# Altium PCB Step Moter Control.PcbDoc
Units mil, origin at the board's own origin, x right, y up, seen from the top; angles counter-clockwise.
Board outline 1555.12 x 1653.54 mil, 2 copper layers (Top Layer, Bottom Layer), stack 34.296 mil thick; 38 components, 33 nets, 129 pads, 48 vias.
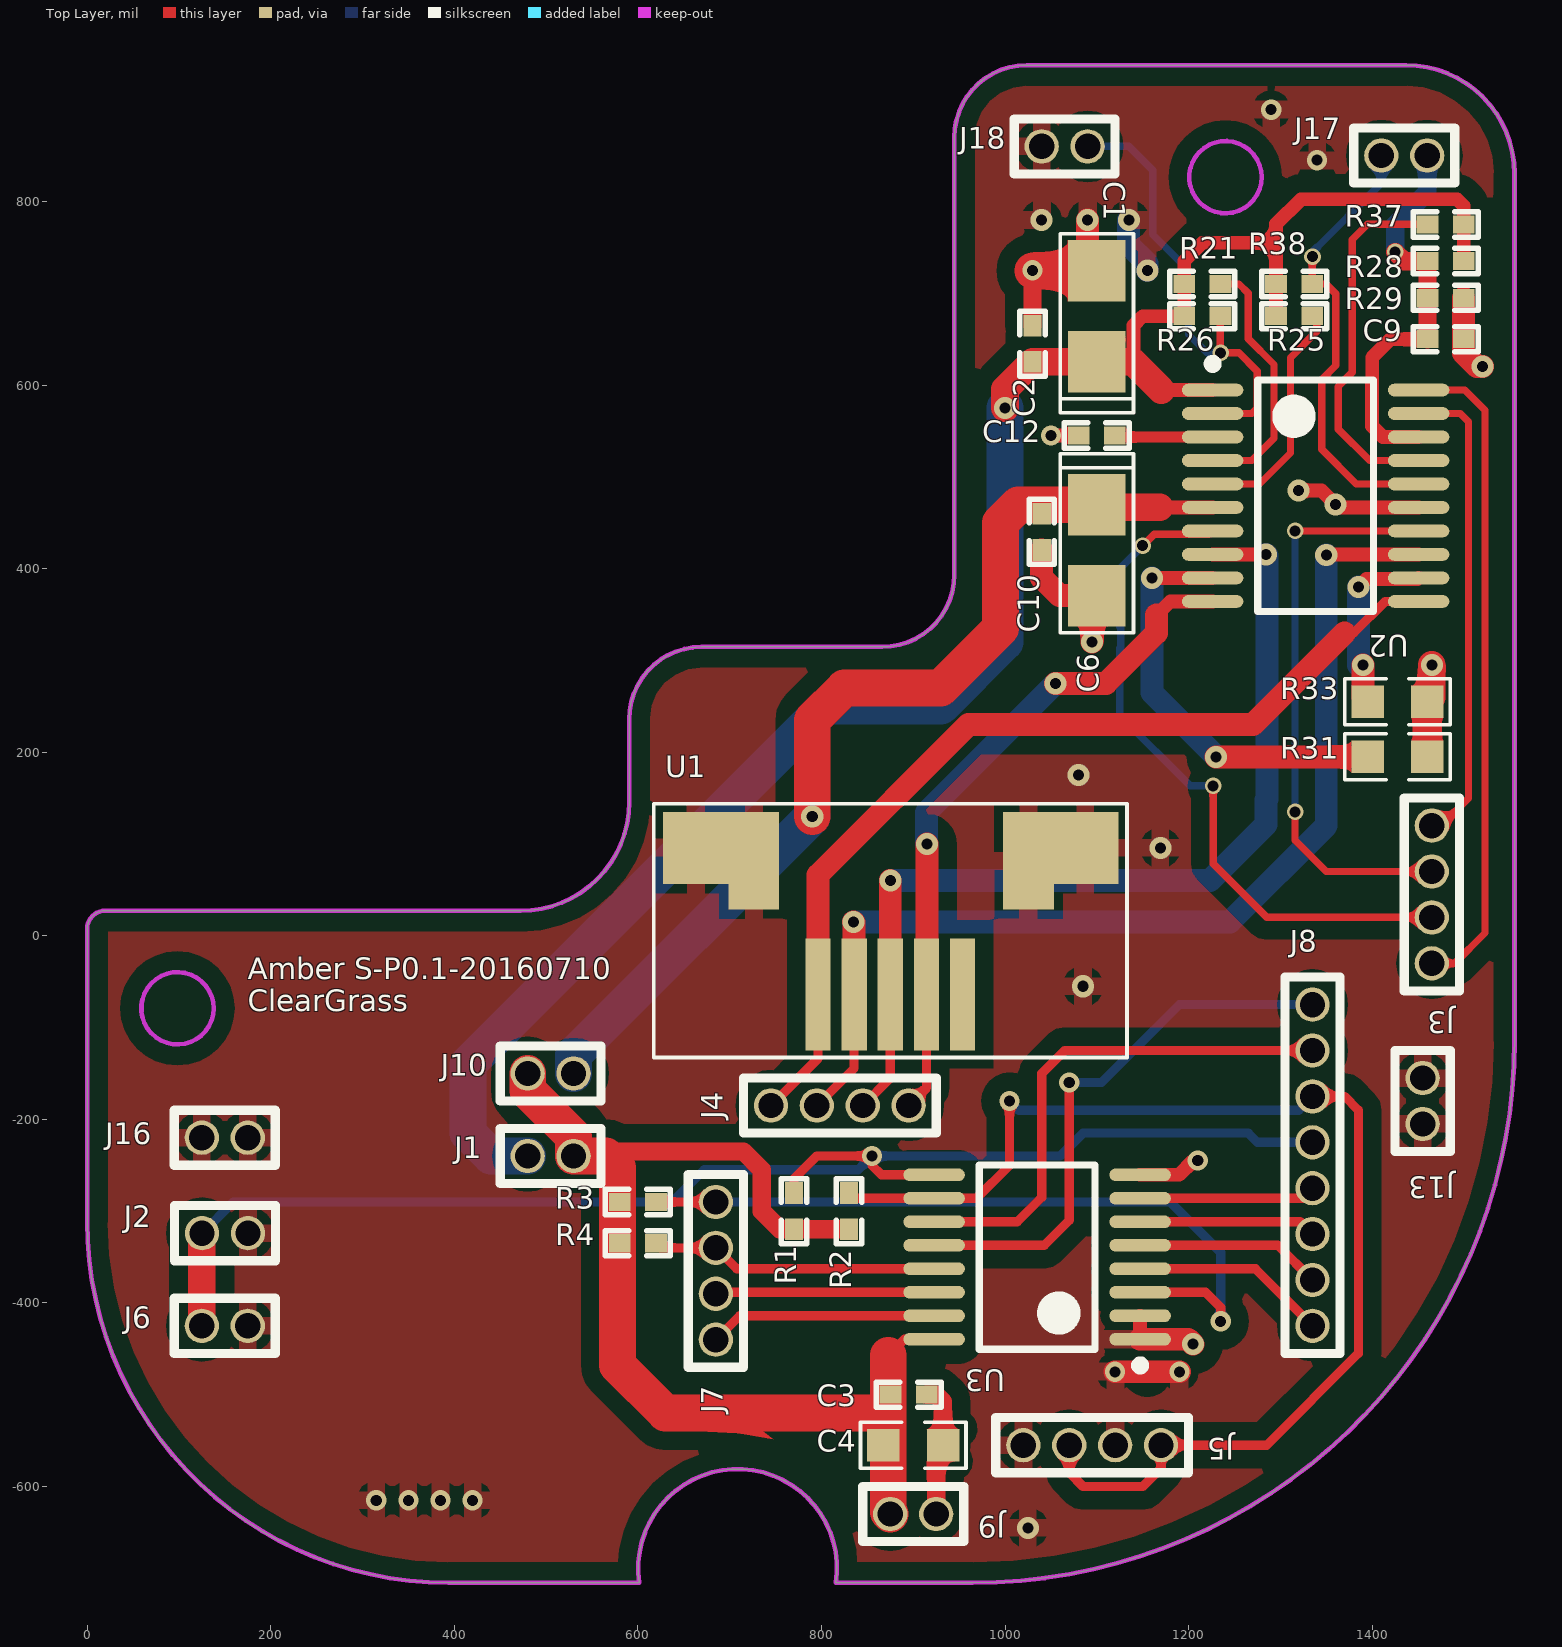
[diagram p0: Top Layer view]
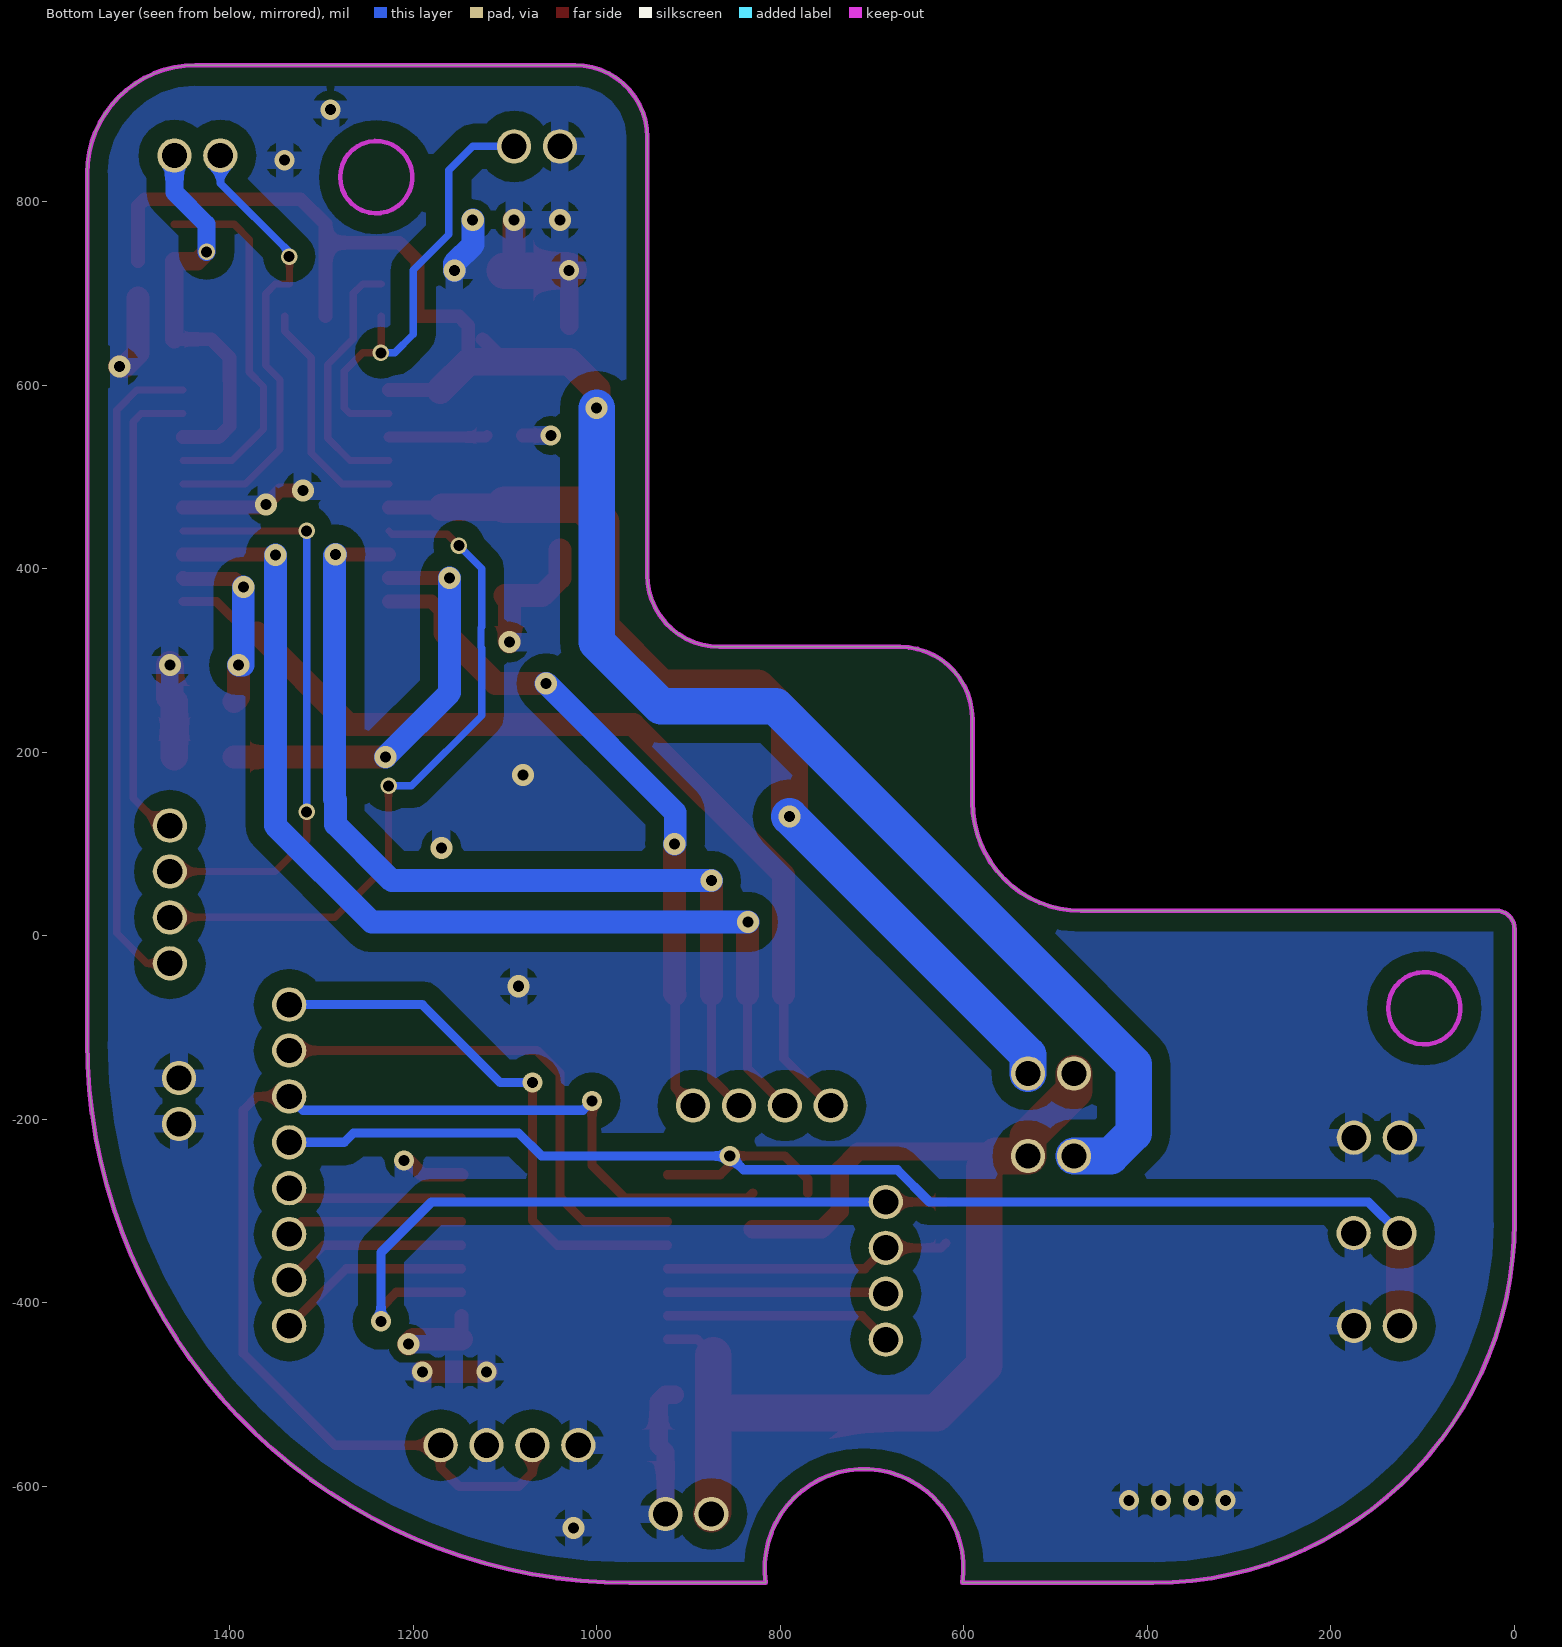
[diagram p1: Bottom Layer view, seen from below]

## Layer stack, top to bottom
Top Solder: solder mask 0.4, Solder Resist, Dk 3.5
Top Layer: signal copper 1.4
Dielectric1: core 31.496, FR-4, Dk 4.8
Bottom Layer: signal copper 1.4
Bottom Solder: solder mask 0.4, Solder Resist, Dk 3.5

## Board outline
0,-311.3 ccw(c393.7,-311.3) 393.7,-705 601.55,-705 cw(c708.66,-689.25) 815.78,-705 964.57,-705 ccw(c964.57,-114.45) 1555.12,-114.45 1555.12,830.43 ccw(c1437.01,830.43) 1437.01,948.54 1023.62,948.54 ccw(c1023.62,869.8) 944.88,869.8 944.88,393.43 cw(c866.14,393.43) 866.14,314.69 669.29,314.69 ccw(c669.29,235.95) 590.55,235.95 590.55,145.39 cw(c472.44,145.39) 472.44,27.28 19.68,27.28 ccw(c19.68,7.6) 0,7.6

## Design rules (kind name [scope] priority, off if disabled: settings)
Clearance [All] p1: gap=10
HoleToHoleClearance [All] p1: gap=0 allowstackedmicrovias=TRUE
MinimumSolderMaskSliver [All] p1: minsoldermaskwidth=0
PolygonConnect PolygonConnect_1 [All vs IsNamedPolygon('Bottom Layer-No Net')] p1: connectstyle=Relief reliefconductorwidth=10 reliefentries=4 polygonreliefangle="90 Angle" airgapwidth=10
PolygonConnect [All] p2: connectstyle=Relief reliefconductorwidth=19.68 reliefentries=4 polygonreliefangle="90 Angle" airgapwidth=10
RoutingVias [All] p1: holewidth=28 width=50 viastyle="Through Hole" minholewidth=28 minwidth=50 maxholewidth=28 maxwidth=50
SilkToSilkClearance [All] p1: silktosilkclearance=0
SilkToSolderMaskClearance SilkscreenOverComponentPads [IsPad] p1: minsilkscreentomaskgap=0 clearancetoexposedcopper=TRUE
SolderMaskExpansion [All] p1: expansion=4
Width [All] p1: maxlimit=50 minlimit=8 preferedwidth=10
26 further rules are at their usual default settings.

## Classes and differential pairs
component class "Remote 8-bit I2C": C3 C4 J7 J8 J9 R3 R4 U3
component class "Step Moter Control": C1 C2 C6 C9 C10 C12 J1 J2 J3 J4 J5 J6 J10 J13 J16 J17 J18 R1 R2 R21 R25 R26 R28 R29 R31 R33 R37 R38 U1 U2

## Components (designator, comment, footprint, x,y, rotation, side; value= is the part's Value field where it differs from the comment)
C1 "10uF/6.3V" 3216 1100,675 r90 top
C2 "0.1uF/10V/X7R/10%" 0402C 1030,645 r90 top
C3 "0.1uF/10V/X7R/10%" 0402C 895,-500 r0 top
C4 "10uF/10V/X7R/10%" 0603C 900,-555 r0 top
C6 "33uF/10V" 3216 1100,420 r270 top
C9 "0.1uF/10V/X7R/10%" 0402C 1480,650 r0 top
C10 "0.1uF/10V/X7R/10%" 0402C 1040,440 r270 top
C12 "220pF/10V 5%" 0402C 1100,545 r180 top
J1 "Jump" "Debug- 1.27*2" 505,-240 r0 top
J2 "TEST" "Debug- 1.27*2" 150.24,-323.98 r0 top locked
J3 "JAMP" "Debug- 1.27*4" 1465,45 r90 top
J4 "JAMP" "Debug- 1.27*4" 820,-185 r0 top
J5 "JAMP" "Debug- 1.27*4" 1095,-555 r180 top
J6 "JAMP" "Debug- 1.27*2" 150,-425 r0 top
J7 "JAMP" "Debug- 1.27*4" 685,-365 r90 top
J8 "JAMP" "Debug- 1.27*8" 1335,-250 r90 top
J9 "JAMP" "Debug- 1.27*2" 900,-630 r0 top
J10 "Jump" "Debug- 1.27*2" 505,-150 r180 top
J13 "Jump" "Debug- 1.27*2" 1455,-180 r90 top
J16 "Jump" "Debug- 1.27*2" 150,-220 r180 top
J17 "JAMP" "Debug- 1.27*2" 1435,850 r0 top
J18 "JAMP" "Debug- 1.27*2" 1065,860 r180 top
R1 "4.7K/1%" 0402R 770,-300 r270 top
R2 "4.7K/1%" 0402R 830,-300 r270 top
R3 "10K/1%" 0402R 600,-290 r180 top
R4 "10K/1%" 0402R 600,-335 r180 top
R21 "1K/1%" 0402R 1215,710 r180 top
R25 "1K/1%" 0402R 1315,675 r180 top
R26 "1K/1%" 0402R 1215,675 r180 top
R28 "2.2M/1%" 0402R 1480,735 r0 top
R29 "1M/1%" 0402R 1480,695 r180 top
R31 "0.33R/1%" 0603R 1460,195 r180 top
R33 "0.33R/1%" 0603R 1460,255 r180 top
R37 "1K/1%" 0402R 1480,775 r0 top
R38 "1K/1%" 0402R 1315,710 r180 top
U1 "VSM1069" 6200 875,15 r180 top
U2 "TC78S600FNG" TSSOP-20 1338.47,505 r0 top
U3 "PCA9538" TSSOP-16 1035,-350 r180 top

## Footprints (in the part's own frame and the unit in brackets; to place one, negate y for a bottom-side part, rotate by r counter-clockwise, add the part's x,y. Pads: shape width x height; smd on the part's side, far side on the other; paste and mask are expansions set on the pad)
0402C [mm]
  rect 0.6x0.5 smd: 1(-0.5,0) 2(0.5,0)
  silkscreen extent -0.9,-0.35 0.9,0.35, body extent -0.51,-0.25 0.51,0.25, height 0.5
0402R [mm]
  rect 0.6x0.5 smd: 1(-0.5,0) 2(0.5,0)
  silkscreen extent -0.9,-0.35 0.9,0.35, body extent -0.51,-0.25 0.51,0.25, height 0.5
0603C [mm]
  rect 0.9x0.9 smd: 1(-0.826,0) 2(0.826,0)
  silkscreen extent -1.46,-0.64 1.46,0.64, body extent -1.38,-0.55 1.38,0.55, height 0.9
0603R [mm]
  rect 0.9x0.9 smd: 1(0,0) 2(1.651,0)
  silkscreen extent -0.64,-0.64 2.29,0.64, body extent -0.55,-0.55 2.2,0.55, height 0.5
3216 [mm]
  rect 1.7x1.6 smd: 1(-1.256,0) 2(1.256,0)
  silkscreen extent -2.67,-1.02 2.29,1.02, body extent -1.72,-0.85 1.72,0.85, height 1.8
6200 [mm]
  rect 0.7x3.1 smd: 1(2,2) 2(1,2) 3(0,2) 4(-1,2) 5(-2,2)
  rect 1.83x2 smd: ""(-5.4,-2.05) ""(5.375,-2.05)
  rect 1.4x2.7 smd: ""(-3.825,-1.7) ""(3.775,-1.7)
  silkscreen extent -6.55,-3.27 6.55,3.75
"Debug- 1.27*2" [mm]
  round 0.95 hole 0.7: 1(-0.635,0) 2(0.635,0)
  silkscreen extent -1.4,-0.76 1.4,0.76, body extent -1.21,-0.58 1.21,0.58
"Debug- 1.27*4" [mm]
  round 0.95 hole 0.7: 1(-1.905,0) 2(-0.635,0) 3(0.635,0) 4(1.905,0)
  silkscreen extent -2.67,-0.76 2.67,0.76
"Debug- 1.27*8" [mm]
  round 0.95 hole 0.7: 1(-4.445,0) 2(-3.175,0) 3(-1.905,0) 4(-0.635,0) 5(0.635,0) 6(1.905,0) 7(3.175,0) 8(4.445,0)
  silkscreen extent -5.21,-0.76 5.21,0.76
TSSOP-16 [mm] "TSOP, 16-Leads, Body 5.1x4.5mm (max), Pitch 0"
  oval 1.7x0.35 smd: 1(-2.85,2.275) 2(-2.85,1.625) 3(-2.85,0.975) 4(-2.85,0.325) 5(-2.85,-0.325) 6(-2.85,-0.975) 7(-2.85,-1.625) 8(-2.85,-2.275) 9(2.85,-2.275) 10(2.85,-1.625) 11(2.85,-0.975) 12(2.85,-0.325) 13(2.85,0.325) 14(2.85,0.975) 15(2.85,1.625) 16(2.85,2.275)
  silkscreen extent -2.98,-2.55 1.6,3.12, body extent -2.25,-2.55 2.25,2.55, height 1.2
TSSOP-20 [mm] "TSOP, 16-Leads, Body 5.1x4.5mm (max), Pitch 0.65mm, IPC Medium Density"
  oval 1.7x0.35 smd: 1(-2.85,2.275) 2(-2.85,1.625) 3(-2.85,0.975) 4(-2.85,0.325) 5(-2.85,-0.325) 6(-2.85,-0.975) 7(-2.85,-1.625) 8(-2.85,-2.275) 9(-2.85,-2.925) 10(-2.85,-3.575) 11(2.85,-3.575) 12(2.85,-2.925) 13(2.85,-2.275) 14(2.85,-1.625) 15(2.85,-0.975) 16(2.85,-0.325) 17(2.85,0.325) 18(2.85,0.975) 19(2.85,1.625) 20(2.85,2.275)
  silkscreen extent -2.97,-3.85 1.6,3.12, body extent -2.25,-3.9 2.25,2.55, height 1.2

## Part data
C1 C6: library part Cap, "厂家：ROHM，型号："
C2 C3 C9 C10 C12: library part CAP, "厂家：Murata，型号：GRM155R71A104KA01D"
C4: library part CAP, "厂家：Murata，型号：GRM188R61A106KE69D"
J1 J10 J13 J16: library part JAMP, "厂家：暂定，型号：暂定"
J2 J3 J4 J5 J6 J7 J8 J9 J17 J18: "厂家：暂定，型号：暂定"
R1 R2 R21 R25 R26 R28 R29 R31 R33 R37 R38: library part RES1, "厂家：Yageo，型号：RC0402FR-074K7L"
R3 R4: library part RES1, "厂家：Yageo，型号：RC0402FR-0710KL"
U1: "厂家：常州唯可泰，型号：VSM1069；二相步进电机"
U3: "厂家：TI，型号：PCA9538 Remote 8-bit I2C with interrupt output"

## Via types
v1: diameter 24, hole 12, Top Layer to Bottom Layer, tented both sides, 26 vias
v2: diameter 22, hole 12, Top Layer to Bottom Layer, tented both sides, 15 vias
v3: diameter 18, hole 12, Top Layer to Bottom Layer, tented both sides, 7 vias

## Nets (pads, with @x,y where several pads share a name; then routed paths per layer and width w, separated by ;. In a path a pad name is that pad's centre, name@x,y a point inside that pad or via, vN(x,y) a via of type N, cw(c..) or ccw(c..) an arc to the next point about the centre after c; other vN are vias at no path point)
2.8V: C3.1 C4.1 J1.2 J9.1 J10.2 R1.2 R2.2 R3.2 R4.2 U3.16 | length 1255
  Top Layer w10: 872.87,-457.13 890.43,-439.57 U3.16
  Top Layer w20: 565,-240 570,-235 715,-235 735,-255 735,-300 754.69,-319.69 R1.2 R2.2
  Top Layer w40: J10.2 480,-168.87 530,-218.87 J1.2 565,-240 577.87,-252.87 577.87,-467.87 630,-520 872.87,-520 ; 872.87,-457.13 872.87,-520 ; J9.1 872.87,-627.87 872.87,-520
AW_CONTROL: J8.2 U3.5 | length 203.5
  Top Layer w10: U3.5 1297.2,-337.2 J8.2
BUZZER_POWER: J8.4 U3.7 | length 192.4
  Top Layer w10: U3.7 1323.98,-286.02 J8.4
CK: J3.1 U2.20 | length 722.6
  Top Layer w8: U2.20 1500.89,594.57 1523,572.46 1523,3 1490,-30 J3.1
CW_CCW: J3.2 U2.7 | length 760
  Top Layer w8: v3(1150,425) 1162.61,437.61 1222.85,437.61 U2.7 ; v3(1226.72,163.28) 1226.72,78.28 1285,20 J3.2
  Bottom Layer w8: v3(1150,425) 1125,400 1125,336.77 1126,335.77 1126,314.23 1125,313.23 1125,240 1201.72,163.28 v3(1226.72,163.28)
DC/DC_CTRL: J8.3 U3.6 | length 193.3
  Top Layer w10: U3.6 1321.61,-311.61 J8.3
DC/DC_PG: J8.7 U3.11 | length 568.6
  Top Layer w10: U3.11 1013.39,-311.61 1040,-285 1040,-150 1065,-125 J8.7
ENABLE: J3.4 U2.19 | length 520.5
  Top Layer w8: U2.19 1496.02,568.98 1505,560 1505,150 1475,120 J3.4
EXTEND_I\N\T\: J7.3 R4.1 U3.13 | length 314.6
  Top Layer w10: R4.1 624.68,-340 J7.3 707.8,-362.8 U3.13
EXTEND_R\E\S\E\T\: J7.4 R3.1 U3.3 | length 822.8
  Top Layer w10: R3.1 J7.4 ; U3.3 1218.39,-388.39 1235,-405 v2(1235,-420)
  Bottom Layer w10: J7.4 1180,-290 1235,-345 v2(1235,-420)
GND: C1.2 C2.2 C3.2 C4.2 C6.2 C9.2 C10.2 C12.2 J2.2 J5.2 J5.4 J6.2 J9.2 J13.1 J13.2 J16.1 J16.2 J18.2 R29.1 R31.1 R33.1 U1. U2.15 U3.1 U3.2 U3.8 | length 1133.5
  Top Layer w15: v2(1050,545) C12.2 ; U3.1 U3.2 ; U3.8 1189.57,-260.43 1205,-245 v2(1210,-245) ; v1(1320,485) 1345,485 v1(1360,470) 1363.39,466.61 U2.15
  Top Layer w20: C3.2 925,-500 932.5,-507.5 C4.2 925,-562.5 J9.2 ; C2.2 v2(1030,725)
  Top Layer w25: v2(1030,725) v2@1030.55,724.45 ; C10.2 1040,390 1059.45,370.55 C6.2 1095,365.55 v1(1095,320) ; v1(1090,780) 1090,734.45 C1.2 ; v2(1120,-475) v2(1190,-475) ; U3.1 1199.57,-439.57 v1(1205,-445) ; R29.1 C9.2 1499.69,634.69 1514.37,620 v1(1520,620)
  Top Layer w30: R31.1 R33.1 1465,260 v1(1465,295)
  Top Layer w40: v2@1030.55,724.45 C1.2
  Bottom Layer w25: v1@1134.5,780 1134.5,753.02 1155,732.52 v1(1155,725)
  other v1: 1025,-645 1085,-55 1169.29,95.71 1080,175 1040,780 1135,780
  other v2: 315,-615 350,-615 385,-615 420,-615 1340,845 1290,900
HALL_OUT: J8.1 U3.4 | length 213.6
  Top Layer w10: U3.4 1272.8,-362.8 J8.1
I2C_A_SCL_T_E: J7.2 U3.14 | length 238.5
  Top Layer w10: J7.2 686.61,-388.39 U3.14
I2C_A_SDA_T_E: J7.1 U3.15 | length 248.6
  Top Layer w10: J7.1 711.02,-413.98 U3.15
INIT_TEST: J2.1 J6.1 J8.5 R1.1 U3.9 | length 1543
  Top Layer w10: R1.1 770,-265 795,-240 v2(855,-240) ; v2@855,-250 865.43,-260.43 U3.9
  Top Layer w30: J6.1 125,-324.21 J2.1
  Bottom Layer w10: J2.1 159.21,-290 637.34,-290 672.34,-255 840,-255 v2(855,-240) 1060,-240 1085,-215 1265,-215 1275,-225 J8.5
M1: R21.1 U2.4 | length 280.8
  Top Layer w8: U2.4 1268.8,517.8 1293,542 1293,622.46 1265,650.46 1265,700 1255,710 R21.1
M2: R25.1 U2.5 | length 259.6
  Top Layer w8: U2.5 1277.2,492.2 1311,526 1311,629.91 1339.68,658.6 R25.1@1339.68,675
M_VCC: C1.1 C2.1 J1.1 R21.2 R25.2 R26.2 R28.2 R37.2 R38.2 U2.1 | length 2134.1
  Top Layer w15: C1.1 C1.1@1124.45,650 ; 1139.45,625.55 1140,626.1 1140,665 1150,675 R26.2 R21.2 1195.31,735.31 1215,755 1295.31,755 ; 1170.43,594.57 U2.1 ; R25.2 R38.2 1295.31,755 ; R28.2 R37.2 1499.69,795.31 1492.66,802.34 1322.34,802.34 1295.31,775.31 1295.31,755
  Top Layer w30: v1(1000,575) 1000,595.32 C2.1 1030.24,625.55 C1.1 1139.45,625.55 1170.43,594.57
  Bottom Layer w40: J1.1 440,-240 415,-215 415,-140 805,250 930,250 1000,320 v1(1000,575)
MO_N: J17.1 R38.1 U2.16 | length 498.2
  Top Layer w8: v3@1334.68,739.68 R38.1 1350,710 1360.5,699.5 1360.5,621.32 1345,605.82 1345,530 1382.8,492.2 U2.16
  Bottom Layer w8: v3(1335,740) 1335,745 1410,820 J17.1
MOTOR_AO1: J4.2 U1.2 U2.13 | length 1171.4
  Top Layer w10: J4.2 835.63,-144.37 U1.2
  Top Layer w15: v1(1350,415) 1350.43,415.43 U2.13
  Top Layer w25: v1(835,15) 835.63,14.37 U1.2
  Bottom Layer w25: v1(835,15) 1245,15 1350,120 v1(1350,415)
MOTOR_AO2: J4.1 U1.1 U2.11 | length 1050.3
  Top Layer w10: J4.1 796.26,-133.74 U1.1 ; 1370,330 1380,330 1414.25,364.25 U2.11
  Top Layer w25: U1.1 796.26,66.26 960,230 1270,230 1370,330
MOTOR_BO1: J4.4 U1.4 U2.10 | length 746.3
  Top Layer w10: J4.4 914.37,-165.63 U1.4
  Top Layer w15: 1165,349.25 1180,364.25 U2.10
  Top Layer w25: U1.4 915,-63.11 v1(915,100) ; v1(1055,275) 1110,275 1165,330 1165,349.25
  Bottom Layer w25: v1(915,100) 914.37,100.63 914.37,134.37 v1(1055,275)
MOTOR_BO2: J4.3 U1.3 U2.8 | length 1045.5
  Top Layer w10: J4.3 875,-155 U1.3
  Top Layer w15: U2.8 v1(1284.57,415.43)
  Top Layer w25: U1.3 v1(875,60)
  Bottom Layer w25: v1(875,60) 1223.16,60 1284.52,121.37 1284.52,148.05 1285.52,149.05 1285.52,414.48 v1(1284.57,415.43)
OSC: C12.1 U2.3 | length 107.2
  Top Layer w12: C12.1 1121.3,543.39 U2.3
P7: J8.8 U3.12 | length 608.7
  Top Layer w10: U3.12 1042.8,-337.2 1070,-310 v2(1070,-160)
  Bottom Layer w10: v2(1070,-160) 1105,-160 1190,-75 J8.8
RESET: J3.3 U2.14 | length 634.7
  Top Layer w8: v3(1316.02,135) 1316.02,103.98 1350,70 J3.3 ; v3(1316.02,441.02) U2.14
  Bottom Layer w8: v3(1316.02,135) v3(1316.02,441.02)
RFA: R33.2 U2.12 | length 201.8
  Top Layer w15: v1(1385,380) 1393.64,388.64 1449.47,388.64 U2.12
  Top Layer w25: v1(1390,295) 1390,260 R33.2
  Bottom Layer w25: v1(1385,380) 1385,295 v1(1390,295)
RFB: R31.2 U2.9 | length 454.9
  Top Layer w15: v1(1160.16,389.84) U2.9
  Top Layer w25: v1(1230,195) R31.2
  Bottom Layer w25: v1(1160.16,389.84) 1160.16,264.84 v1(1230,195)
STBY: J18.1 R26.1 U2.2 | length 499.9
  Top Layer w8: U2.2 1268.98,568.98 1275,575 1275,615 1255,635 v3(1235,635) 1234.68,635.32 R26.1
  Bottom Layer w8: J18.1 1135,860 1161,834 1161,764 1200,725 1200,655 1220,635 v3(1235,635)
SW_TEST: J5.1 J5.3 J8.6 R2.1 U3.10 | length 1349.8
  Top Layer w10: R2.1 835.71,-286.02 U3.10 968.98,-286.02 1005,-250 v2(1005,-180) ; J5.3 1070,-585 1085,-600 1150,-600 1170,-580 J5.1 1285,-555 1385,-455 1385,-190 1370,-175 J8.6
  Bottom Layer w10: v2(1005,-180) 1015,-190 1320,-190 J8.6
TQ: R37.1 U2.17 | length 403.4
  Top Layer w8: U2.17 1397.2,517.8 1363,552 1363,598.37 1378.5,613.86 1378.5,758.5 1395,775 R37.1
VM: C6.1 C10.1 J10.1 U2.6 | length 1094.6
  Top Layer w15: 1168.39,466.61 U2.6
  Top Layer w30: C6.1 1102.83,466.61 1168.39,466.61
  Top Layer w40: v1(790,130) 790,235 825,270 930,270 995,335 995,450 1014.45,469.45 C6.1
  Bottom Layer w40: J10.1 530,-130 v1(790,130)
VREF: C9.1 J17.2 R28.1 R29.2 U2.18 | length 443.3
  Top Layer w15: U2.18 1411.61,543.39 1399.71,555.29 1399.71,604.67 1400,604.96 1400,630 1420,650 C9.1
  Top Layer w20: v3(1425,745) 1435,735 R28.1 ; C9.1 R28.1
  Bottom Layer w20: v3(1425,745) 1425,775 1460,810 J17.2
pads on no net: U1.5

## Polygon pours and split planes (outlines as drawn)
GND on Top Layer "Top Layer-No Net" (solid, remove dead copper, pour order 39): 0,-311.3 ccw(c393.7,-311.3) 393.7,-705 601.55,-705 cw(c708.66,-689.25) 815.78,-705 964.57,-705 ccw(c964.57,-114.45) 1555.12,-114.45 1555.12,830.43 ccw(c1437.01,830.43) 1437.01,948.54 1023.62,948.54 ccw(c1023.62,869.8) 944.88,869.8 944.88,393.43 cw(c866.14,393.43) 866.14,314.69 669.29,314.69 ccw(c669.29,235.95) 590.55,235.95 590.55,145.39 cw(c472.44,145.39) 472.44,27.28 19.68,27.28 ccw(c19.68,7.6) 0,7.6
GND on Bottom Layer "Bottom Layer-No Net1" (solid, remove dead copper, pour order 40): 0,-311.3 ccw(c393.7,-311.3) 393.7,-705 601.55,-705 cw(c708.66,-689.25) 815.78,-705 964.57,-705 ccw(c964.57,-114.45) 1555.12,-114.45 1555.12,830.43 ccw(c1437.01,830.43) 1437.01,948.54 1023.62,948.54 ccw(c1023.62,869.8) 944.88,869.8 944.88,393.43 cw(c866.14,393.43) 866.14,314.69 669.29,314.69 ccw(c669.29,235.95) 590.55,235.95 590.55,145.39 cw(c472.44,145.39) 472.44,27.28 19.68,27.28 ccw(c19.68,7.6) 0,7.6

## Keep-outs
Keep-Out Layer:
  circle w5: c98.43,-79.02 r39.37
  circle w5: c1240.16,826.5 r39.37
  lines w5: 0,-311.3 ccw(c393.7,-311.3) 393.7,-705 601.55,-705 cw(c708.66,-689.25) 815.78,-705 964.57,-705 ccw(c964.57,-114.45) 1555.12,-114.45 1555.12,830.43 ccw(c1437.01,830.43) 1437.01,948.54 1023.62,948.54 ccw(c1023.62,869.8) 944.88,869.8 944.88,393.43 cw(c866.14,393.43) 866.14,314.69 669.29,314.69 ccw(c669.29,235.95) 590.55,235.95 590.55,145.39 cw(c472.44,145.39) 472.44,27.28 19.68,27.28 ccw(c19.68,7.6) 0,7.6 0,-311.3

## Silkscreen, mask and mechanical layers (free items; w line width, h text height)
Top Overlay:
  text "Amber S-P0.1-20160710" at 175,-55 h40
  text "ClearGrass" at 175,-90 h40